# Altium PCB BaseStation.PcbDoc
Units mm, origin at the board's own origin, x right, y up, seen from the top; angles counter-clockwise.
Board outline 98.17 x 79.26 mm, 2 copper layers (Top Layer, Bottom Layer); 78 components, 65 nets, 312 pads, 263 vias.
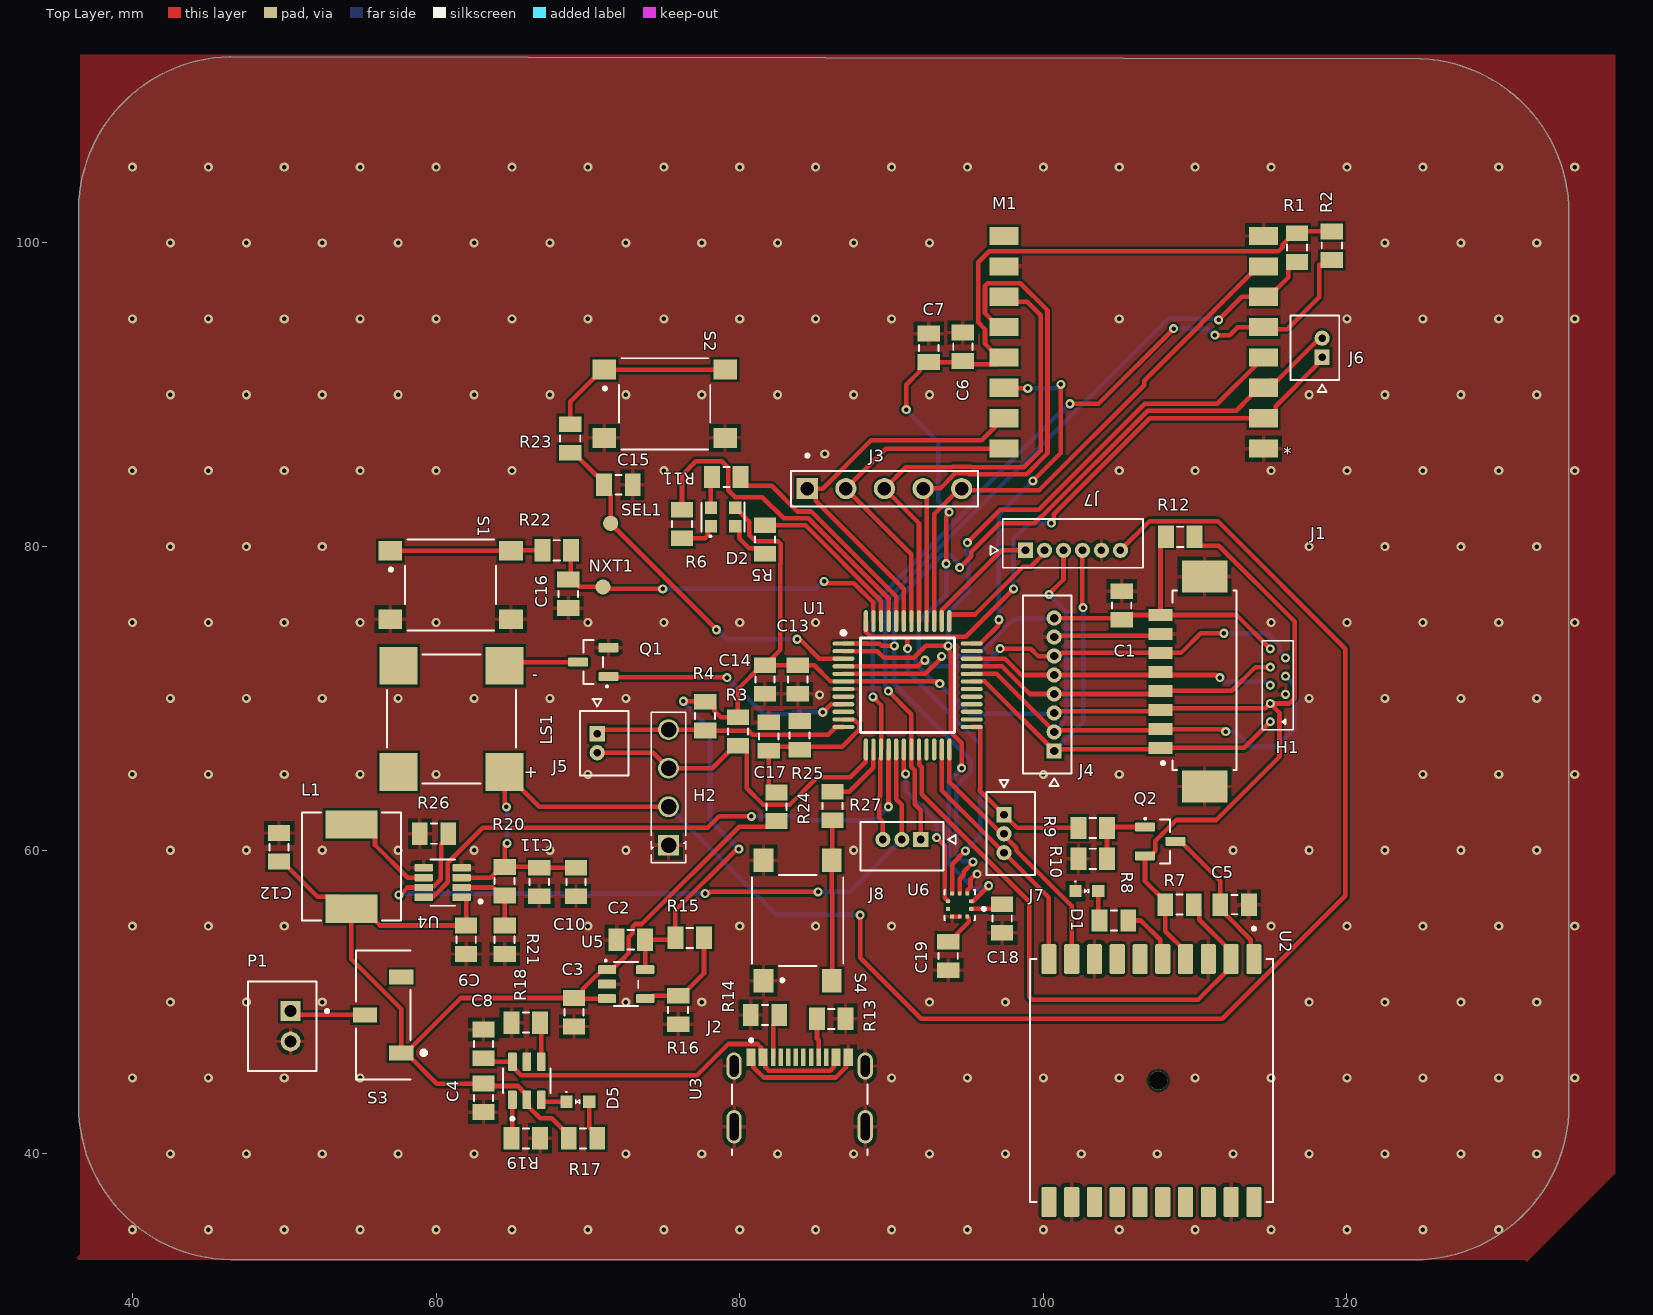
[diagram p0: Top Layer view]
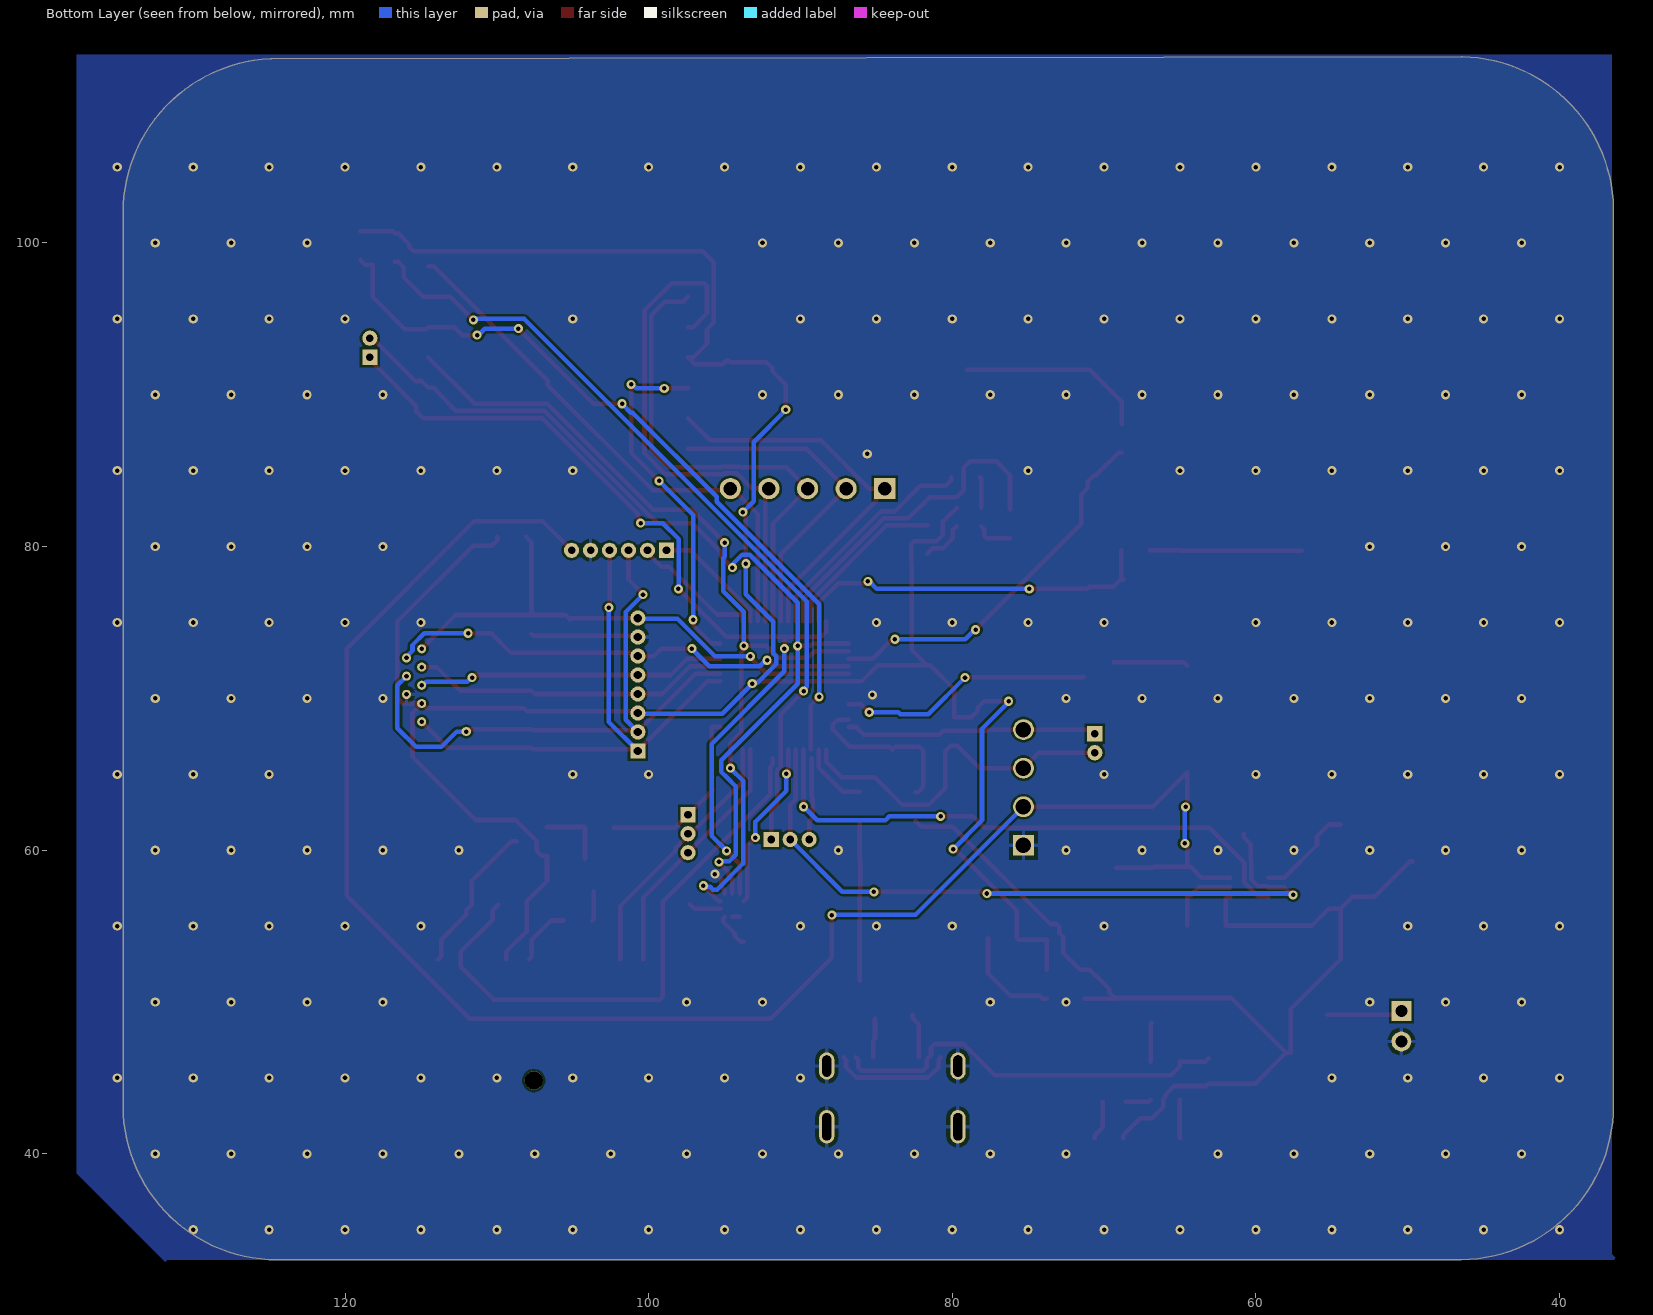
[diagram p1: Bottom Layer view, seen from below]
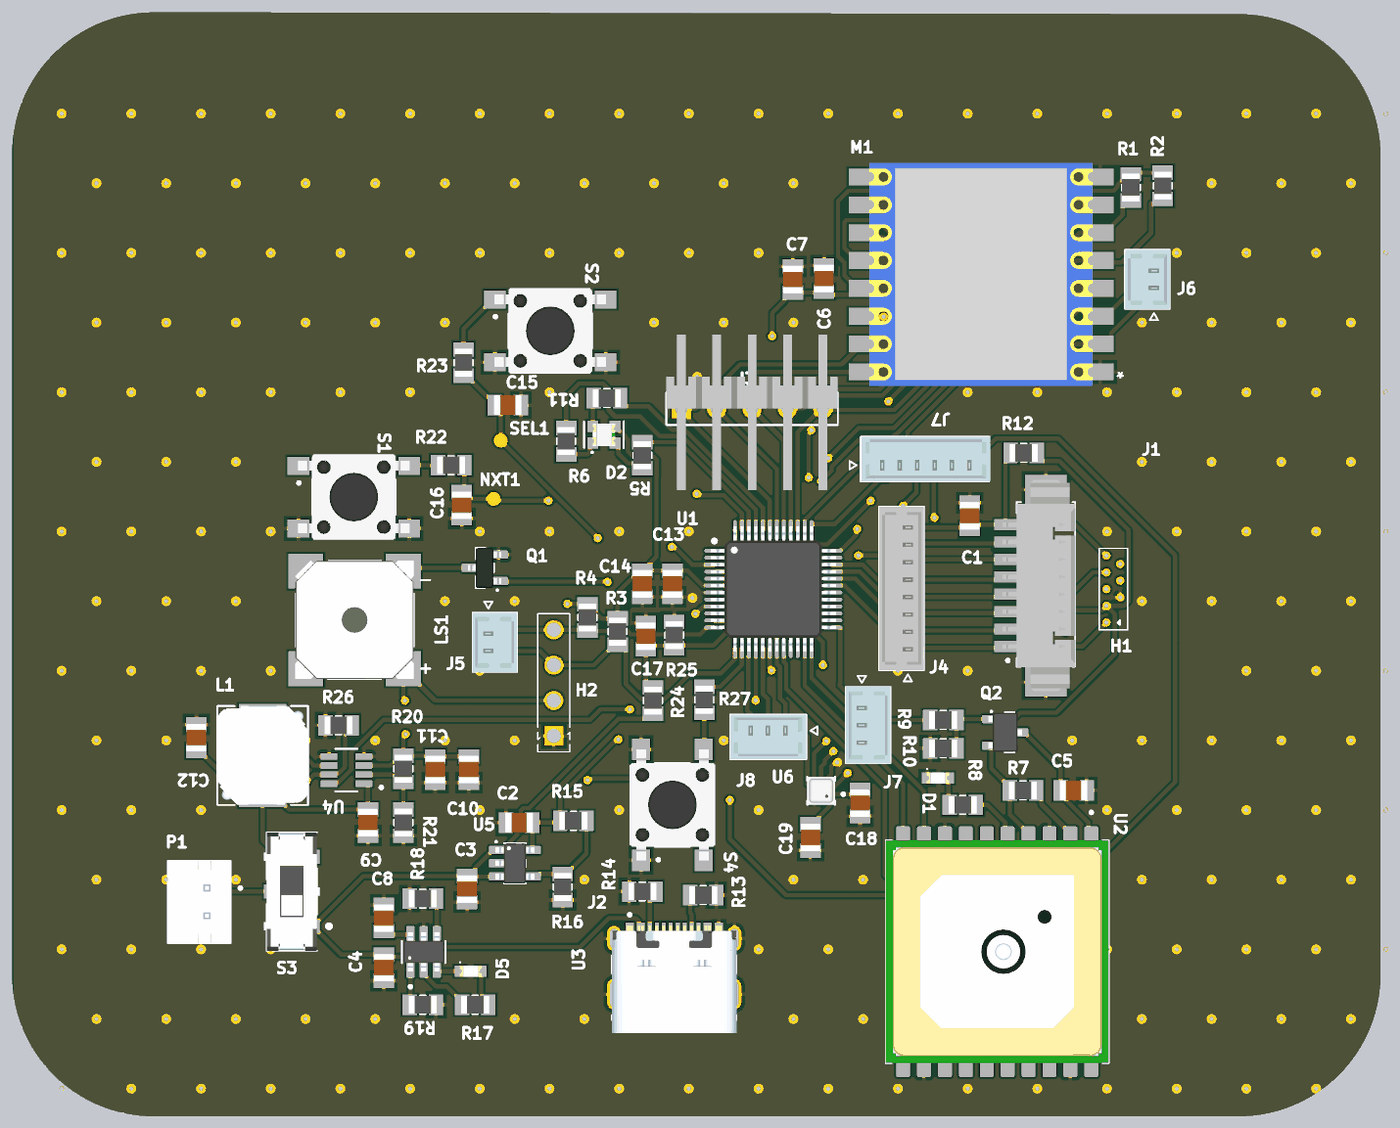
[diagram p2: 3D render of the assembled board from above, using the file's embedded part models]

## Layer stack, top to bottom
Top Solder: solder mask 0.0102, Solder Resist, Dk 3.5
Top Layer: signal copper 0.0356
Dielectric 1: dielectric 0.32, FR-4, Dk 4.8
Bottom Layer: signal copper 0.0356
Bottom Solder: solder mask 0.0102, Solder Resist, Dk 3.5

## Board outline
36.449,43.18 ccw(c46.609,43.18) 46.466,33.021 46.482,33.02 124.46,33.02 ccw(c124.46,43.18) 134.604,42.61 134.62,42.672 134.62,101.981 ccw(c124.46,101.981) 124.888,112.132 124.841,112.141 46.482,112.278 46.429,112.267 ccw(c46.609,102.108) 36.45,102.251 36.449,102.235

## Design rules (kind name [scope] priority, off if disabled: settings)
Clearance "Stitching GND" [IsStitchingVia and InNet('GND') vs (IsVia and (Not IsStitchingVia)) Or IsPad] p1: gap=0.127 ignorepadtopadclearanceinfootprint=FALSE
Clearance "Stitching No Net" [IsStitchingVia and InNet('No Net') vs (IsVia and (Not IsStitchingVia)) Or IsPad] p2: gap=0.127 ignorepadtopadclearanceinfootprint=FALSE
Clearance [All] p3: gap=0.152 ignorepadtopadclearanceinfootprint=FALSE
HoleSize [All] p1: absolutevalues=TRUE maxlimit=6.2 minlimit=0.3 maxpercent=80.000 minpercent=20.000
MinimumAnnularRing [All] p1: minimumring=0.15
MinimumSolderMaskSliver [All] p1: minsoldermaskwidth=0.1
PolygonConnect ViaConnect [IsVia] p1: connectstyle=Direct reliefconductorwidth=0.254 reliefentries=4 polygonreliefangle="90 Angle" airgapwidth=0.254
PolygonConnect [All] p2: connectstyle=Relief reliefconductorwidth=0.254 reliefentries=4 polygonreliefangle="90 Angle" airgapwidth=0.254
RoutingVias [All] p1: holewidth=0.3 width=0.6 viastyle="Through Hole" minholewidth=0.3 minwidth=0.5 maxholewidth=1 maxwidth=5
SilkToSilkClearance [All] p1: silktosilkclearance=0.1
SilkToSolderMaskClearance [IsPad] p1: minsilkscreentomaskgap=0.1 clearancetoexposedcopper=TRUE
SolderMaskExpansion [All] p1: expansion=0.051 istentingtop=FALSE
SupplyNets "Schematic Supply Nets_2" [InNet('3V3')] p1: voltage=0.000
SupplyNets "Schematic Supply Nets_1" [InNet('GND')] p2: voltage=0.000
SupplyNets "Schematic Supply Nets" [InNet('5V')] p3: voltage=0.000
Width [All] p1: maxlimit=25.4 minlimit=0.15 preferedwidth=0.3
26 further rules are at their usual default settings.

## Components (designator, comment, footprint, x,y, rotation, side; value= is the part's Value field where it differs from the comment)
C1 "1nF" CAPACITOR_0805_2012M-70N 105.156,76.124 r270 top
C2 "22uF" CAPACITOR_0805_2012M-70N 72.822,54.102 r0 top
C3 "22uF" CAPACITOR_0805_2012M-70N 69.088,49.327 r90 top
C4 "2.2uF" CAPACITOR_0805_2012M-70N 63.119,43.688 r270 top
C5 "22uF" CAPACITOR_0805_2012M-70N 112.598,56.417 r180 top
C6 "22uF" CAPACITOR_0805_2012M-70N 94.698,93.164 r90 top
C7 "220nF" CAPACITOR_0805_2012M-70N 92.456,93.091 r90 top
C8 "2.2uF" CAPACITOR_0805_2012M-70N 63.119,47.244 r270 top
C9 "22uF" CAPACITOR_0805_2012M-70N 61.976,54.102 r270 top
C10 "22uF" CAPACITOR_0805_2012M-70N 69.215,57.912 r90 top
C11 "22uF" CAPACITOR_0805_2012M-70N 66.802,57.912 r90 top
C12 "22uF" CAPACITOR_0805_2012M-70N 49.657,60.198 r270 top
C13 "100nF" CAPACITOR_0805_2012M-70N 83.82,71.247 r90 top
C14 "10uF" CAPACITOR_0805_2012M-70N 81.661,71.247 r90 top
C15 "2.2uF" CAPACITOR_0805_2012M-70N 72.009,84.074 r180 top
C16 "2.2uF" CAPACITOR_0805_2012M-70N 68.707,76.886 r90 top
C17 "100nF" CAPACITOR_0805_2012M-70N 81.915,67.488 r270 top
C18 "100nF" CAPACITOR_0805_2012M-70N 97.282,55.499 r90 top
C19 "100nF" CAPACITOR_0805_2012M-70N 93.726,53.035 r90 top
D1 "LTST-C190 Series" LED_0603_1608M_0.80mm 102.87,57.306 r0 top
D2 "B38G3RGB-10D0003H2U1930" LED_B38G3RGB-10D0003H2U1930_0606_1616M 78.905,81.948 r90 top
D5 "LTST-C190 Series" LED_0603_1608M_0.80mm 69.342,43.434 r0 top
H1 "Headerless Pogo Holes 8-pin" POGO_8_PIN_HEADER 115.451,70.866 r90 top
H2 "Header - 2.54mm,1x4-pin" HEADER_2.54MM_1x4PIN 75.311,64.135 r90 top
J1 "0532610871" MOLEX_0532610871 110.617,71.12 r90 top
J2 "UJ20-C-H-G-SMT-P16-TR" SAMESKY_UJ20-C-H-G-SMT-P16-TR 83.949,39.683 r0 top
J3 "5-146280-5" TE_5-146280-5 89.535,83.82 r0 top
J4 "0530470810" MOLEX_0530470810 100.711,70.916 r270 top
J5 "0530470210" MOLEX_0530470210 70.612,67.046 r90 top
J6 "0530470210" MOLEX_0530470210 118.364,93.101 r270 top
J7 "0530470310" MOLEX_0530470310 97.409,61.087 r90 top
J7 "0530470610" MOLEX_0530470610 101.951,79.756 r180 top
J8 "0530470310" MOLEX_0530470310 90.678,60.706 r0 top
L1 "SPM6530T-1R5M100" IND_SPM6530T-1R5M100 54.426,58.922 r90 top
LS1 "CMT-8504-100-SMT-TR" XDCR_CMT-8504-100-SMT-TR 61.016,68.651 r180 top
M1 "LORA127X-C1" LoRa127X-C1 113.959,101.456 r180 top
NXT1 "Test Pad" "Test Pad" 70.993,77.343 r0 top
P1 "B2B-PH-K-S" JST_B2B-PH-K-S 49.869,48.403 r90 top
Q1 "AS2312" SOT23-3N-1.15mm 70.358,72.39 r180 top
Q2 "SSM3J328R,LF" SOT23F-3-0.8mm 107.696,60.579 r0 top
R1 "180K" RESISTOR_0805_2012M-50N 116.713,99.695 r90 top
R2 "180K" RESISTOR_0805_2012M-50N 118.999,99.822 r90 top
R3 "4.7k" Resistor_0805_2012M-50N 79.883,67.818 r90 top
R4 "4.7k" Resistor_0805_2012M-50N 77.724,68.834 r90 top
R5 "220" RESISTOR_0805_2012M-50N 81.661,80.467 r90 top value=4.7K
R6 "220" RESISTOR_0805_2012M-50N 76.2,81.483 r90 top value=10K
R7 "180k" Resistor_0805_2012M-50N 108.966,56.417 r180 top
R8 "1K" RESISTOR_0805_2012M-50N 104.648,55.372 r0 top
R9 "1K" RESISTOR_0805_2012M-50N 103.251,61.468 r0 top
R10 "39K" RESISTOR_0805_2012M-50N 103.251,59.436 r0 top
R11 "220" RESISTOR_0805_2012M-50N 79.121,84.582 r0 top value=4.7K
R12 "47k" Resistor_0805_2012M-50N 109.017,80.645 r0 top
R13 "5.1K" RESISTOR_0805_2012M-50N 86.03,48.895 r180 top
R14 "5.1K" RESISTOR_0805_2012M-50N 81.661,49.149 r0 top
R15 "11K" RESISTOR_0805_2012M-50N 76.708,54.229 r180 top
R16 "2.2K" RESISTOR_0805_2012M-50N 75.946,49.479 r90 top
R17 "1.5K" RESISTOR_0805_2012M-50N 69.672,41.021 r0 top
R18 "560" RESISTOR_0805_2012M-50N 65.913,48.641 r0 top
R19 "10K" RESISTOR_0805_2012M-50N 65.913,41.021 r180 top
R20 "910K" RESISTOR_0805_2012M-50N 64.516,57.963 r90 top
R21 "100K" RESISTOR_0805_2012M-50N 64.516,54.102 r90 top
R22 "5.1K" RESISTOR_0805_2012M-50N 67.945,79.756 r0 top
R23 "5.1K" RESISTOR_0805_2012M-50N 68.834,87.122 r270 top
R24 "1M" RESISTOR_0805_2012M-50N 82.423,62.865 r270 top
R25 "1M" RESISTOR_0805_2012M-50N 83.947,67.564 r270 top
R26 "100K" RESISTOR_0805_2012M-50N 59.868,61.087 r0 top
R27 "5.1K" RESISTOR_0805_2012M-50N 86.106,62.916 r90 top
S1 "PTS645SL43SMTR92LFS" SW_PTS645SL43SMTR92LFS 60.96,77.47 r0 top
S2 "PTS645SL43SMTR92LFS" SW_PTS645SL43SMTR92LFS 75.057,89.408 r0 top
S3 "JS102011JCQN" SW_JS102011JCQN 56.515,49.149 r90 top
S4 "PTS645SL43SMTR92LFS" SW_PTS645SL43SMTR92LFS 83.82,55.372 r90 top
SEL1 "Test Pad" "Test Pad" 71.501,81.534 r270 top
U1 "MSP430FR2355TPT" LQFP_PT_48_N 91.059,70.866 r0 top
U2 "CD-PA1616D" XCVR_CD-PA1616D 107.119,44.831 r270 top
U3 "BQ21040DBVR" SOT95P280X145-6N 65.974,44.816 r90 top
U4 "RT4812GJ8F" SOT65P279X100-8N 60.432,57.871 r180 top
U5 "TLV75801PDBVR" SOT23-5N-1.45mm 72.517,51.181 r0 top
U6 "BMP390L" XDCR_BMP390L 94.488,56.388 r270 top

## Footprints (in the part's own frame and the unit in brackets; to place one, negate y for a bottom-side part, rotate by r counter-clockwise, add the part's x,y. Pads: shape width x height; smd on the part's side, far side on the other; paste and mask are expansions set on the pad)
CAPACITOR_0805_2012M-70N [mm] "Capacitor, 0805 (2012 metric), 0.7mm high, nominal pads,"
  rect 1.04x1.47 smd mask+0.051: 1(-0.94,0) 2(0.94,0)
  silkscreen extent -0.2,-0.64 0.2,0.64, body extent -1,-0.73 1,0.73, height 1.23
HEADER_2.54MM_1x4PIN [mm]
  rect 1.37x1.37 hole 1.02: 1(-3.81,0)
  round 1.37 hole 1.02: 2(-1.27,0) 3(1.27,0) 4(3.81,0)
  silkscreen extent -4.95,-1.14 4.95,1.14
IND_SPM6530T-1R5M100 [mm]
  rect 1.85x3.4 smd: 1(-2.775,0) 2(2.775,0)
  silkscreen extent -3.55,-3.25 3.55,3.25, body extent -3.55,-3.25 3.55,3.25, height 3
JST_B2B-PH-K-S [mm]
  rect 1.308x1.308 / inner round 1.308 / far side rect 1.308x1.308 hole 0.8: 1(1,-0.55)
  round 1.308 hole 0.8: 2(-1,-0.55)
  silkscreen extent -2.95,-3.05 2.95,2.25, body extent -2.95,-2.25 2.95,2.25, height 6
LED_0603_1608M_0.80mm [mm] "LED, 0603 (1608 metric), 0.8mm high"
  rect 0.8x0.8 smd mask+0.051: A(0.75,0) C(-0.75,0)
  silkscreen extent -0.79,-0.12 0.13,0.66, body extent -0.8,-0.4 0.8,0.4, height 0.8
LED_B38G3RGB-10D0003H2U1930_0606_1616M [mm] "RGB LED, 0606 (1616 metric), 0.4mm high"
  rect 0.813x0.8 smd mask+0.051: 1(-0.602,0.8) 2(0.602,0.8) 3(0.602,-0.8) 4(-0.602,-0.8)
  silkscreen extent -1.3,-1.42 0.97,1.42, body extent -0.8,-0.8 0.8,0.8, height 0.4
LoRa127X-C1 [mm]
  rect 1.9x1.2 smd paste-10 mask+0: 1(-0.55,15) 2(-0.55,13) 3(-0.55,11) 4(-0.55,9) 5(-0.55,7) 6(-0.55,5) 7(-0.55,3) 8(-0.55,1) 9(16.55,1) 10(16.55,3) 11(16.55,5) 12(16.55,7) 13(16.55,9) 14(16.55,11) 15(16.55,13) 16(16.55,15)
  body extent 0,0 16,16, height 2.1
LQFP_PT_48_N [mm]
  oval 1.45x0.28 smd paste+0 mask+0.051: 1(-4.225,2.75) 2(-4.225,2.25) 3(-4.225,1.75) 4(-4.225,1.25) 5(-4.225,0.75) 6(-4.225,0.25) 7(-4.225,-0.25) 8(-4.225,-0.75) 9(-4.225,-1.25) 10(-4.225,-1.75) 11(-4.225,-2.25) 12(-4.225,-2.75) 25(4.225,-2.75) 26(4.225,-2.25) 27(4.225,-1.75) 28(4.225,-1.25) 29(4.225,-0.75) 30(4.225,-0.25) 31(4.225,0.25) 32(4.225,0.75) 33(4.225,1.25) 34(4.225,1.75) 35(4.225,2.25) 36(4.225,2.75)
  oval 0.28x1.45 smd paste+0 mask+0.051: 13(-2.75,-4.225) 14(-2.25,-4.225) 15(-1.75,-4.225) 16(-1.25,-4.225) 17(-0.75,-4.225) 18(-0.25,-4.225) 19(0.25,-4.225) 20(0.75,-4.225) 21(1.25,-4.225) 22(1.75,-4.225) 23(2.25,-4.225) 24(2.75,-4.225) 37(2.75,4.225) 38(2.25,4.225) 39(1.75,4.225) 40(1.25,4.225) 41(0.75,4.225) 42(0.25,4.225) 43(-0.25,4.225) 44(-0.75,4.225) 45(-1.25,4.225) 46(-1.75,4.225) 47(-2.25,4.225) 48(-2.75,4.225)
  silkscreen extent -4.35,-3.1 3.1,3.57, body extent -4.5,-4.5 4.5,4.5, height 1.6
MOLEX_0530470210 [mm]
  rect 1x1 hole 0.5 mask+0.051: 1(0.625,0)
  round 1 hole 0.5 mask+0.051: 2(-0.625,0)
  silkscreen extent -2.12,-2.07 2.93,1.12, body extent -2.12,-2.06 2.13,1.14, height 4.21
MOLEX_0530470310 [mm] "Header - Picoblade 03-pin, TH, STR, 4.2mm height"
  rect 1x1 hole 0.5 mask+0.051: 1(1.25,0)
  round 1 hole 0.5 mask+0.051: 2(0,0) 3(-1.25,0)
  silkscreen extent -2.73,-2.05 3.55,1.15, body extent -2.75,-2.06 2.75,1.14, height 4.21
MOLEX_0530470610 [mm]
  rect 1x1 hole 0.5 mask+0.051: 1(3.125,0)
  round 1 hole 0.5 mask+0.051: 2(1.875,0) 3(0.625,0) 4(-0.625,0) 5(-1.875,0) 6(-3.125,0)
  silkscreen extent -4.62,-2.05 5.43,1.15, body extent -4.67,-2.06 4.58,1.14, height 4.21
MOLEX_0530470810 [mm]
  rect 1x1 hole 0.55 mask+0.051: 1(4.375,0)
  round 1 hole 0.55 mask+0.051: 2(3.125,0) 3(1.875,0) 4(0.625,0) 5(-0.625,0) 6(-1.875,0) 7(-3.125,0) 8(-4.375,0)
  silkscreen extent -5.87,-2.05 6.68,1.15, body extent -5.87,-2.05 5.87,1.15, height 4.2
MOLEX_0532610871 [mm] "Header - Picoblade 08-pin, SMT, RA, 3.4mm height"
  rect 0.8x1.6 smd mask+0.051: 1(-4.375,2.9) 2(-3.125,2.9) 3(-1.875,2.9) 4(-0.625,2.9) 5(0.625,2.9) 6(1.875,2.9) 7(3.125,2.9) 8(4.375,2.9)
  rect 2.1x3 smd mask+0.051: MP1(-6.925,0) MP2(6.905,0)
  silkscreen extent -5.83,-2.1 5.98,2.83, body extent -7.57,-2.1 7.58,3.1, height 3.42
POGO_8_PIN_HEADER [mm] "8-pin header for pogo pins"
  round 0.6 hole 0.3 mask+0.051: 1(-2.4,0.5) 2(-1.2,0.5) 3(-0.6,-0.5) 4(0,0.5) 5(0.6,-0.5) 6(1.2,0.5) 7(1.8,-0.5) 8(2.4,0.5)
  silkscreen extent -2.93,-1.02 2.93,1.03
RESISTOR_0805_2012M-50N [mm] "Resistor, 0805 (2012 metric), nominal pads"
  rect 1.04x1.47 smd mask+0.051: 1(-0.94,0) 2(0.94,0)
  silkscreen extent -0.2,-0.66 0.2,0.66, body extent -1,-0.63 1,0.62, height 0.5
Resistor_0805_2012M-50N [mm] "Resistor, 0805 (2012 metric), nominal pads"
  rect 1.04x1.47 smd mask+0.051: 1(-0.94,0) 2(0.94,0)
  silkscreen extent -0.2,-0.66 0.2,0.66, body extent -1,-0.63 1,0.62, height 0.5
SAMESKY_UJ20-C-H-G-SMT-P16-TR [mm]
  rect 0.595x1.15 smd mask+0.051: A1_B12(-3.2,6.675) A1_B12(3.2,6.675) A4_B9(-2.4,6.675) B4_A9(2.4,6.675)
  rect 0.295x1.15 smd mask+0.051: A5(-1.75,6.675) A6(-0.75,6.675) A7(0.75,6.675) A8(1.75,6.675) B5(1.25,6.675) B6(0.25,6.675) B7(-0.25,6.675) B8(-1.25,6.675)
  oval 1x1.8 hole 0.6 slot 1.4 at 90 deg: SH1(-4.32,6.1) SH3(4.32,6.1)
  oval 1x2.2 hole 0.6 slot 1.8 at 90 deg: SH2(-4.32,2.1) SH4(4.32,2.1)
  silkscreen extent -4.47,0.25 4.47,7.9, body extent -4.49,-0.69 4.49,7.01, height 3.31
SOT23-3N-1.15mm [mm] "SOT23, 3-pin, 1.15mm high, nominal pads"
  rrect25% 1.32x0.6 smd mask+0.051: 1(-1,0.95) 2(-1,-0.95) 3(1,0)
  silkscreen extent -0.93,-1.45 0.65,1.63, body extent -1.19,-1.45 1.21,1.45, height 0.91
SOT23-5N-1.45mm [mm] "SOT23, 5 pins, nominal pads, 1.45mm high"
  rrect25% 1.21x0.59 smd mask+0.051: 1(-1.255,0.95) 2(-1.255,0) 3(-1.255,-0.95) 4(1.255,-0.95) 5(1.255,0.95)
  silkscreen extent -1.37,-1.45 0.8,1.57, body extent -1.4,-1.45 1.4,1.45, height 1.45
SOT23F-3-0.8mm [mm] "SOT23, 3-pin, flat leads, 0.8mm high"
  rrect25% 1.32x0.6 smd mask+0.051: 1(-1,0.95) 2(-1,-0.95) 3(1,0)
  silkscreen extent -1.02,-1.45 0.65,1.52, body extent -1.2,-1.4 1.2,1.4, height 0.88
SOT65P279X100-8N [mm]
  rrect25% 1.22x0.48 smd: 1(-1.25,0.975) 2(-1.25,0.325) 3(-1.25,-0.325) 4(-1.25,-0.975) 5(1.25,-0.975) 6(1.25,-0.325) 7(1.25,0.325) 8(1.25,0.975)
  silkscreen extent -2.6,-1.53 0.8,1.53
SOT95P280X145-6N [mm]
  rrect25% 1.21x0.58 smd: 1(-1.255,0.95) 2(-1.255,0) 3(-1.255,-0.95) 4(1.255,-0.95) 5(1.255,0) 6(1.255,0.95)
  silkscreen extent -2.6,-1.56 0.8,1.56, body extent -1.4,-1.45 1.4,1.45, height 1.45
SW_JS102011JCQN [mm]
  rect 1x1.6 smd: 1(-2.5,-1.2) 2(0,1.2) 3(2.5,-1.2)
  silkscreen extent -4.25,-2.81 4.25,1.8, body extent -4.25,-2 4.25,2, height 5.35
SW_PTS645SL43SMTR92LFS [mm]
  rect 1.55x1.3 smd: 1(-3.975,2.25) 2(3.975,2.25) 3(-3.975,-2.25) 4(3.975,-2.25)
  silkscreen extent -4.04,-3 3,3, body extent -4,-3 4,3, height 4.3
TE_5-146280-5 [mm]
  rect 1.398x1.398 / inner round 1.398 / far side rect 1.398x1.398 hole 0.89: 1(-5.08,0)
  round 1.398 hole 0.89: 2(-2.54,0) 3(0,0) 4(2.54,0) 5(5.08,0)
  silkscreen extent -6.15,-1.17 6.15,2.27, body extent -6.15,-5.84 6.15,5.33, height 1.17
"Test Pad" [mm] "Exposed copper pad"
  round 1 smd paste-10: 1(0,0)
XCVR_CD-PA1616D [mm]
  rrect25% 2x1 smd: 1(-8,6.75) 2(-8,5.25) 3(-8,3.75) 4(-8,2.25) 5(-8,0.75) 6(-8,-0.75) 7(-8,-2.25) 8(-8,-3.75) 9(-8,-5.25) 10(-8,-6.75) 11(8,-6.75) 12(8,-5.25) 13(8,-3.75) 14(8,-2.25) 15(8,-0.75) 16(8,0.75) 17(8,2.25) 18(8,3.75) 19(8,5.25) 20(8,6.75)
  round 1.21 hole 1.21 unplated: ""(0,0.45)
  silkscreen extent -10.1,-8 8,8, body extent -8,-8 8,8, height 6.7
XDCR_BMP390L [mm]
  rect 0.25x0.275 smd: 1(0.25,0.763) 2(-0.25,0.763) 6(-0.25,-0.763) 7(0.25,-0.763)
  rect 0.275x0.25 smd: 3(-0.763,0.5) 4(-0.763,0) 5(-0.763,-0.5) 8(0.763,-0.5) 9(0.763,0) 10(0.763,0.5)
  silkscreen extent -1,-1 1,1.69, body extent -1,-1 1,1, height 0.8
XDCR_CMT-8504-100-SMT-TR [mm]
  rect 2.5x2.5 smd: 1(3.5,3.5) 2(3.5,-3.5) N(-3.5,-3.5) P(-3.5,3.5)
  silkscreen extent -4.25,-4.25 4.25,4.25, body extent -4.25,-4.28 4.28,4.25, height 4

## Part data
C1: library part "Generic Capacitor", "Passive - Capacitor, Generic", Tolerance=5%
C2 C3 C5 C6 C13 C14 C17: library part "Generic Capacitor", "Passive - Capacitor, Generic", Tolerance=?%
C4 C8: library part C0805C225K8PACTU, "Passive - Capacitor, X5R, 2.2uF Max, 10V, 0805 (2012 Metric), ±10%, -55°C ~ 85°C. 2uF @ 5V, 1.1uF @ 10V", Capacitance at Rated Voltage=50%, Package=0402, Rated Voltage=10V, Supplier 1 Part No.=399-C0805C225K8PAC7800-ND, Temp Range="-55°C ~ 85°C", Temperature Coefficient=X5R, Tolerance=±10%, APSS Standard Part="APSS Standard", MF Part No.=C0805C225K8PACTU, Supplier 1=Digikey
C7: library part C0805C224K1RAC7800, "Passive - Capacitor, X7R, 220nF Max, 100V, 0805 (2012 Metric), ±10%, -55°C ~ 85°C. 200nF @ 10V, 110nF @ 50V, 55nF @ 100V", Capacitance at Rated Voltage=25%, Package=0805, Rated Voltage=100V, Supplier 1 Part No.=399-C0805C224K1RAC7800CT-ND, Temp Range="-55°C ~ 85°C", Temperature Coefficient=X7R, Tolerance=±10%, APSS Standard Part="APSS Standard", MF Part No.=C0805C224K1RAC7800, Supplier 1=Digikey
C9 C10 C11 C12: library part GRM21BR61C226ME44L, "Passive - Capacitor, X5R, 22uF Max, 16V, 0805 (2012 Metric), ±20%, -55°C ~ 85°C. 9.4uF @ 5V, 3.2uF @ 15V, 1.9uF @ 25V", Capacitance at Rated Voltage=10%, Package=0805, Rated Voltage=16V, Supplier 1 Part No.=490-10747-1-ND, Temp Range="-55°C ~ 85°C", Temperature Coefficient=X5R, Tolerance=±20%, APSS Standard Part="APSS Standard", MF Part No.=GRM21BR61C226ME44L, Supplier 1=Digikey
C15 C16: library part C0805C225K8PACTU, "Passive - Capacitor, X5R, 2.2uF Max, 10V, 0805 (2012 Metric), ±10%, -55°C ~ 85°C. 2uF @ 5V, 1.1uF @ 10V", Capacitance at Rated Voltage=50%, Package=0805, Rated Voltage=10V, Supplier 1 Part No.=399-C0805C225K8PAC7800-ND, Temp Range="-55°C ~ 85°C", Temperature Coefficient=X5R, Tolerance=±10%, APSS Standard Part="APSS Standard", MF Part No.=C0805C225K8PACTU, Supplier 1=Digikey
C18 C19: library part C0805C102J1GACTU, "Passive - Capacitor, C0G, 1nF, 100V, 0805 (2012 Metric), ±5%, -55°C ~ 125°C.", Capacitance at Rated Voltage=100%, Package=0805, Rated Voltage=100V, Supplier 1 Part No.=399-C0805C102J1GAC7800CT-ND, Temp Range="-55°C ~ 125°C", Temperature Coefficient=C0G, Tolerance=±5%, APSS Standard Part="APSS Standard", MF Part No.=C0805C102J1GACTU, Supplier 1=Digikey
D1: "Diode - LED, 0603", Colour=Green, MF Part No.=LTST-C190KGKT, Package=0603, Rated Voltage="5V Reverse", Temp Range="-30°C ~ 85°C", APSS Standard Part="APSS Standard", Supplier 1=Digikey
D2: "Diode - LED, RGB, 2V Red, 3V Green, 3V Blue 0606 (1616 Metric)", Package=0606, Supplier 1 Part No.=3147-B38G3RGB-10D0003H2U1930CT-ND, Temp Range="-40°C ~ 85°C", APSS Standard Part="APSS Standard", MF Part No.=B38G3RGB-10D0003H2U1930, Supplier 1=Digikey
D5: "Diode - LED, 0603", Colour=Green, MF Part No.=LTST-C190KGKT, Package=0603, Rated Voltage="5V Reverse", Supplier 1 Part No.=160-1435-1-ND, Temp Range="-30°C ~ 85°C", APSS Standard Part="APSS Standard", Supplier 1=Digikey
J1: "Header - Picoblade 08-pin, SMT, RA", Supplier 1 Part No.=WM7626CT-ND, APSS Standard Part="APSS Standard", MF Part No.=0532610871, Mounting Type="Surface Mount", Orientation="Right Angle", Pins=8, Pitch=1.25mm, Supplier 1=Digikey
J2: "Header - USB-C 2.0 Surface Mount, Receptacle Connector 24 Position (16+8 Dummy), Right Angle, Long mounting legs", MF Part No.=USB4105-GF-A, Rated Voltage=48VDC, Supplier 1 Part No.=2073-USB4105-GF-ACT-ND, Temp Range="-40°C ~ 85°C", APSS Standard Part="APSS Standard", Supplier 1=Digikey
J3: "05 MODII HDR SRST B/A .100CL", Package=None, Availability=Unavailable, MP=5-146280-5, Price=None
J4: "Header - Picoblade 08-pin, TH, STR", Supplier 1 Part No.=WM1737-ND, APSS Standard Part="APSS Standard", MF Part No.=0530470810, Mounting Type=Through-hole, Orientation=Straight, Pins=8, Pitch=1.25mm, Supplier 1=Digikey
J5 J6: "Header - Picoblade 02-pin, TH, STR", Supplier 1 Part No.=WM1731-ND, APSS Standard Part="APSS Standard", MF Part No.=0530470210, Mounting Type=Through-hole, Orientation=Straight, Pins=2, Pitch=1.25mm, Supplier 1=Digikey
J7 J8: "Header - Picoblade 03-pin, TH, STR", Supplier 1 Part No.=WM1732-ND, APSS Standard Part="APSS Standard", MF Part No.=0530470310, Mounting Type=Through-hole, Orientation=Straight, Pins=3, Pitch=1.25mm, Supplier 1=Digikey
J7: "Header - Picoblade 06-pin, TH, STR", Supplier 1 Part No.=WM1735-ND, APSS Standard Part="APSS Standard", MF Part No.=0530470610, Mounting Type=Through-hole, Orientation=Straight, Pins=6, Pitch=1.25mm, Supplier 1=Digikey
L1: "1.5 ÂµH Shielded Drum Core, Wirewound Inductor 11 A 10.67mOhm Max Nonstandard", Package="NON STANDARD-2 TDK", Check_prices=https://www.snapeda.com/parts/SPM6530T-1R5M100/TDK/view-part/?ref=eda, Digi-Key_Part_Number=445-3881-2-ND, MF=TDK, MP=SPM6530T-1R5M100, Purchase-URL=https://pricing.snapeda.com/search/part/SPM6530T-1R5M100/?ref=eda, SnapEDA_Link=https://www.snapeda.com/parts/SPM6530T-1R5M100/TDK/view-part/?ref=snap
LS1: "8.5 mm, 5 Vo-p, 100 dB, Surface Mount (SMT), Magnetic Audio Transducer Buzzer", MF Part No.=CMT-8504-100-SMT-TR
P1: "Connector Header Through Hole 2 position 0.079 (2.00mm)", Package=None, Check_prices=https://www.snapeda.com/parts/B2B-PH-K-S/JST/view-part/?ref=eda, MF="JST Sales America Inc.", MP=B2B-PH-K-S, SnapEDA_Link=https://www.snapeda.com/parts/B2B-PH-K-S/JST/view-part/?ref=snap
Q1: "Transistor - MOSFET, N-Channel AS2312", Package=SOT23-3, Power=1.2W, Rated Voltage="20 Vds", Supplier 1 Part No.=4530-AS2312CT-ND, Temp Range="0°C ~ 150°C (TJ)", APSS Standard Part="APSS Standard", MF Part No.=AS2312, Supplier 1=Digikey
Q2: "Transistor - MOSFET, P-Channel SSM3J328R,LF", Package=SOT23-3, Power=1W, Rated Voltage="20 Vds", Supplier 1 Part No.=SSM3J328RLFCT-ND, Temp Range="0°C ~ 150°C (TJ)", APSS Standard Part="APSS Standard", MF Part No.=SSM3J328R,LF, Supplier 1=Digikey
R1 R2 R8 R9 R10 R13 R14 R15 R16 R17 R18 R19 R20 R21 R22 R23 R24 R25 R26 R27: library part "Generic Resistor", "Passive - Resistor, Generic", Tolerance=?%
R3 R4 R5 R6 R11 R12: library part "Generic Resistor", "Passive - Resistor, Generic", Tolerance=5%
  R5 R6 R11: MF Part No.=220
R7: library part "RMCF0805JT Series", "Passive - Resistor Series, 0805, 5%, 100m - 22M, E24, 0.063W, 1/16W, ±200ppm/°C, -55°C ~ 155°C, 0805 (2012 Metric)", MF Part No.=RMCF0805JT180K, Package=0805, Power=1/8W, Rated Voltage=150V, Temp Range="-55°C ~ 155°C", Temperature Coefficient=±200ppm/°C, Tolerance=5%, Value Range="100m ~ 22M", APSS Standard Part="APSS Standard", E Series=E24, Supplier 1=Digikey
S1 S2: "Switch - SPST, Momentary, Normally Open, 50mA @ 12VDC", MF Part No.=SW_PTS645SL43SMTR92LFS, Rated Voltage="250V AC", Supplier 1 Part No.=CKN10880CT-ND, Temp Range="-40°C ~ 85°C", APSS Standard Part="APSS Standard", Mounting Type="Surface Mount", Supplier 1=Digikey
S3: "Switch - Slide, SPDT, Straight, Break Before Make, 300mA, 6V", Rated Voltage=6V, Supplier 1 Part No.=CKN10721CT-ND, Temp Range="-40°C ~ 85°C", APSS Standard Part="APSS Standard", MF Part No.=JS102011JCQN, Mounting Type=Through-hole, Orientation=Straight, Supplier 1=Digikey
S4: "Switch - Tact, SPST, Momentary, Normally Open, 50mA @ 12VDC", MF Part No.=SW_PTS645SL43SMTR92LFS, Rated Voltage="250V AC", Supplier 1 Part No.=CKN10880CT-ND, Temp Range="-40°C ~ 85°C", APSS Standard Part="APSS Standard", Mounting Type="Surface Mount", Supplier 1=Digikey
U1: "IC - Microcontroller, 24MHz, 32KB FRAM, Op-Amps/PGAs, 12-bit DACs, 12-bit ADC, 48-LQFP, -40 to 105C", Package=LQFP-48, Rated Voltage=3.6V, Supplier 1 Part No.=296-50260-ND, Temp Range="-40°C ~ 105°C", APSS Standard Part="APSS Standard", MF Part No.=MSP430FR2355TPT, Supplier 1=Digikey
U2: "CD-PA1616DGNSS patch antenna module", Package=Package, Availability="Not in stock", Check_prices=https://www.snapeda.com/parts/CD-PA1616D/CD+Top/view-part/?ref=eda, MF="CD Top", MP=CD-PA1616D, Price=None, SnapEDA_Link=https://www.snapeda.com/parts/CD-PA1616D/CD+Top/view-part/?ref=snap
U3: "1-cell, 0.8-A Li-ion and Li-polymer battery charger", Package="SOT-23-6 Texas Instruments", Check_prices=https://www.snapeda.com/parts/BQ21040DBVR/Texas+Instruments/view-part/?ref=eda, MF="Texas Instruments", MP=BQ21040DBVR, SnapEDA_Link=https://www.snapeda.com/parts/BQ21040DBVR/Texas+Instruments/view-part/?ref=snap
U4: "Boost Switching Regulator IC Positive Adjustable 1.8V 1 Output 2A SOT-23-8 Thin, TSOT-23-8", Package="TSOT-23 Richtek", Availability=Unavailable, DigiKey-Purchase-URL=https://snapeda.com/shop?store=DigiKey&id=699858, MF="Richtek USA", MP=RT4812GJ8F, Price=None, SnapEDA_Link=https://www.snapeda.com/parts/RT4812GJ8F/Richtek%20USA%20Inc./view-part/699858/?ref=snap
U5: "IC - Regulator, LDO, 500 mA, Low Quiescent Current, SOT23-5 /  / Vout=Vfeedback *(1+(R1/R2)) / where the feedback voltage is 0.55V", Package=SOT-23-5, Rated Voltage=6V, Supplier 1 Part No.=296-TLV75801PDBVRCT-ND, Temp Range="-40°C ~ 125°C (TJ)", APSS Standard Part="APSS Standard", MF Part No.=TLV75801PDBVR, Supplier 1=Digikey
U6: "Pressure Sensor 4.35PSI ~ 18.13PSI (30kPa ~ 125kPa) Absolute - - 10-WFLGA", Package=None, Check_prices=https://www.snapeda.com/parts/BMP390L/Bosch+Sensortec/view-part/?ref=eda, MF="Bosch Sensortec", MP=BMP390L, SnapEDA_Link=https://www.snapeda.com/parts/BMP390L/Bosch+Sensortec/view-part/?ref=snap

## Via types
v1: diameter 0.6, hole 0.3, Top Layer to Bottom Layer, 263 vias

## Nets (pads, with @x,y where several pads share a name; then routed paths per layer and width w, separated by ;. In a path a pad name is that pad's centre, name@x,y a point inside that pad or via, vN(x,y) a via of type N, cw(c..) or ccw(c..) an arc to the next point about the centre after c; other vN are vias at no path point)
3V3: C2.2 C6.1 C7.1 C13.2 C14.2 D2.3 H1.2 J1.3 J4.3 M1.13 Q2.2 R1.2 R2.2 R3.2 R4.2 R7.2 R12.2 R15.2 U1.6 U2.4 U5.5 | length 180.3
  Top Layer w0.3: U5.5 73.772,54.092 C2.2 75.641,54.102 R15.2 75.768,56.046 79.793,60.071 v1(79.942,60.071) v1@80.01,60.071 ; v1(76.287,69.81) 77.903,69.81 78.309,69.404 78.309,69.189 78.74,68.758 R3.2 79.883,70.624 81.446,72.187 C14.2 C14.2@81.672,72.187 ; D2.3 79.705,82.544 79.955,82.294 79.961,82.294 80.201,82.054 80.23,82.054 80.407,81.877 80.407,81.848 80.624,81.631 80.624,80.762 81.036,80.349 82.521,80.349 82.698,80.172 82.698,78.882 82.677,78.86 82.677,73.192 C14.2@81.672,72.187 ; v1(90.973,89.027) 90.973,90.668 91.871,91.566 91.871,91.781 92.241,92.151 C7.1 94.625,92.151 C6.1 94.913,92.224 95.131,92.006 96.959,92.006 M1.13 97.059,92.456 96.157,93.358 96.157,94.328 95.704,94.78 95.704,98.729 96.431,99.456 115.487,99.456 115.761,99.731 115.761,99.898 116.498,100.635 R1.2 116.84,100.762 R2.2 ; v1(93.177,70.977) 93.096,70.977 92.956,71.116 U1.6 85.983,71.116 84.912,72.187 C13.2 C14.2@81.672,72.187 ; v1(93.599,78.867) 93.599,82.005 93.788,82.194 v1(93.788,82.275) ; J4.3 100.811,69.141 108.013,69.141 108.214,69.342 114.626,69.342 H1.2 H1.2 H1.2@114.954,69.664 ; U2.4 109.369,53.331 108.026,54.674 R7.2 108.026,56.632 106.696,57.962 Q2.2 107.056,59.629 107.378,59.951 107.378,60.605 108.763,61.99 111.39,61.99 115.554,66.154 115.554,69.064 H1.2@114.954,69.664 ; R12.2 109.957,80.43 110.327,80.06 111.56,80.06 116.554,75.066 116.554,70.016 116.201,69.664 H1.2@114.954,69.664
  Bottom Layer w0.3: v1@76.2,69.85 78.042,68.008 78.042,61.971 v1(79.942,60.071) ; v1@90.932,89.027 93.076,86.883 93.076,82.986 v1(93.788,82.275) ; v1(93.599,78.867) 93.599,76.857 91.788,75.046 91.788,72.955 91.6,72.767 91.6,72.267 92.833,71.034 93.119,71.034 95.163,68.991 100.661,68.991 J4.3
5V: C10.2 C11.2 H2.2 J7.6 LS1.P R20.2 U4.3 | length 116.3
  Top Layer w0.3: U4.3 63.594,58.196 64.301,58.903 R20.2 ; v1@64.516,60.325 R20.2 ; v1(64.632,62.853) 64.632,62.934 64.516,63.05 LS1.P 66.802,62.865 H2.2 ; C10.2 C11.2 66.751,58.903 R20.2 ; v1(87.935,55.721) 87.935,52.908 91.948,48.895 111.787,48.895 119.888,56.996 119.888,73.279 111.485,81.682 107.002,81.682 J7.6
  Bottom Layer w0.3: v1(64.684,60.452) v1@64.684,62.697 ; H2.2 82.423,55.753 v1@87.884,55.753
"BMP C\S\": U1.18 U6.6 | length 11.2
  Top Layer w0.3: U1.18 90.809,65.228 90.932,65.105 v1(90.932,65.024) ; v1(92.964,60.833) 93.504,60.293 93.504,56.859 U6.6
  Bottom Layer w0.3: v1(90.932,65.024) 90.932,63.904 92.964,61.872 v1(92.964,60.833)
Button1: C16.2 NXT1.1 R22.2 U1.47 | length 24.3
  Top Layer w0.3: R22.2 68.885,78.004 C16.2 68.922,77.826 69.405,77.343 NXT1.1 71.12,77.216 v1(74.93,77.216) ; v1@85.598,77.597 87.503,77.597 88.809,76.291 U1.47
  Bottom Layer w0.3: v1(74.93,77.216) 84.988,77.216 85.48,77.708 v1(85.557,77.708)
Button2: C15.2 R23.2 SEL1.1 U1.3 | length 24.9
  Top Layer w0.3: R23.2 69.049,86.182 70.572,84.659 70.699,84.659 71.069,84.289 C15.2 71.069,83.859 71.501,83.427 SEL1.1 71.501,81.509 78.459,74.551 v1(78.459,74.526) ; v1@83.82,73.787 83.823,73.79 84.071,73.79 85.245,72.616 U1.3
  Bottom Layer w0.3: v1@78.486,74.549 79.135,73.9 v1(83.782,73.9)
CTS: J7.1@98.826,79.756 U1.38 | length 7.9
  Top Layer w0.3: U1.38 93.319,75.101 93.319,75.812 97.263,79.756 J7.1@98.826,79.756
DIO1: J3.1 M1.15 U1.43 | length 26.2
  Top Layer w0.3: U1.43 90.799,75.101 90.799,77.222 85.004,83.017 85.004,83.271 J3.1 85.471,83.82 88.646,86.995 95.948,86.995 M1.15
DIO2: J3.2 M1.16 U1.42 | length 22
  Top Layer w0.3: U1.42 91.309,79.506 J3.2 89.631,86.456 M1.16
DIO3: J3.3 M1.11 U1.41 | length 32.9
  Top Layer w0.3: U1.41 91.809,81.546 J3.3 90.932,85.217 93.956,85.217 94.013,85.274 95.217,85.274 95.274,85.217 98.711,85.217 99.822,86.328 99.822,95.25 98.933,96.139 97.726,96.139 M1.11
DIO4: J3.4 M1.12 U1.40 | length 35.8
  Top Layer w0.3: U1.40 92.309,83.289 92.075,83.523 J3.4 92.1,83.845 93.224,83.845 94.2,84.821 95.03,84.821 95.087,84.765 98.899,84.765 100.274,86.14 100.274,95.568 98.484,97.358 96.334,97.358 96.157,97.181 96.157,95.358 97.059,94.456 M1.12
DIO5: J3.5 M1.7 U1.39 | length 35.8
  Top Layer w0.3: U1.39 92.809,82.148 94.481,83.82 J3.5 94.709,83.726 99.728,83.726 106.636,90.634 106.636,90.933 114.159,98.456 M1.7
EN: J8.2 R26.2 U1.17 U4.7 | length 47.3
  Top Layer w0.3: v1(57.548,57.057) 57.629,57.057 58.119,57.546 U4.7 59.272,57.636 59.865,57.636 60.317,58.089 60.317,59.363 60.336,59.383 60.336,60.4 60.808,60.872 R26.2 ; v1(77.724,57.15) 77.781,57.207 77.994,57.207 78.044,57.257 v1(85.168,57.257) ; U1.17 90.309,63.361 90.678,62.992 J8.2
  Bottom Layer w0.3: v1@57.404,57.15 v1(77.724,57.15) ; v1@85.09,57.277 87.249,57.277 J8.2
G\P\S\_\E\N\: J7.1@97.409,62.337 R9.1 U1.25 | length 12.3
  Top Layer w0.3: U1.25 95.848,68.116 95.858,68.106 95.858,64.095 95.82,64.057 95.82,63.926 97.059,62.687 97.409,62.337 97.759,61.987 98.278,61.468 R9.1
GND: C1.1 C2.1 C3.1 C4.2 C5.1 C6.2 C7.2 C8.1 C9.2 C10.1 C11.1 C12.1 C13.1 C14.1 C15.1 C16.1 C17.1 C18.1 C19.1 D1.C H1.3 H2.1 J1.7 J1.MP1 J1.MP2 J2.A1_B12 J2.SH1 J2.SH2 J2.SH3 J2.SH4 J4.7 J7.5 M1.1 M1.8 M1.10 P1.2 Q1.2 R10.1 R13.1 R14.1 R16.1 R18.1 R19.1 R21.1 R25.1 R26.1 S1.3 S1.4 S2.3 S2.4 S4.1 S4.2 U1.7 U2.3 U2.8 U2.12 U2.19 U3.5 U4.4 U4.5 U5.2 U6.3 U6.8 U6.9 | length 17.3
  Top Layer w0.3: J2.A1_B12@80.749,46.358 80.896,46.21 80.896,45.71 81.579,45.028 86.319,45.028 87.001,45.71 87.001,46.21 J2.A1_B12@87.149,46.358 ; U6.8 U6.9 ; U6.3 94.988,57.354 95.202,57.569 95.202,58.097 95.471,58.365 95.576,58.365 v1(95.633,58.423) ; J4.7 100.811,74.141 107.613,74.141 J1.7
  other v1: 40,35 45,35 50,35 55,35 60,35 65,35 70,35 75,35 80,35 85,35 90,35 95,35 100,35 105,35 110,35 115,35 120,35 125,35 130,35 42.5,40 47.5,40 52.5,40 57.5,40 62.5,40 72.5,40 77.5,40 82.5,40 87.5,40 92.5,40 97.5,40 102.5,40 107.5,40 112.5,40 117.5,40 122.5,40 127.5,40 132.5,40 40,45 45,45 50,45 55,45 90,45 95,45 100,45 105,45 110,45 115,45 120,45 125,45 130,45 135,45 42.5,50 47.5,50 52.5,50 72.5,50 77.5,50 92.5,50 97.5,50 117.5,50 122.5,50 127.5,50 132.5,50 40,55 45,55 50,55 70,55 80,55 85,55 90,55 115,55 120,55 125,55 130,55 135,55 42.5,60 47.5,60 52.5,60 57.5,60 62.5,60 67.5,60 72.5,60 87.5,60 112.5,60 117.5,60 122.5,60 127.5,60 132.5,60 40,65 45,65 50,65 55,65 60,65 70,65 100,65 105,65 125,65 130,65 135,65 42.5,70 47.5,70 52.5,70 57.5,70 62.5,70 67.5,70 72.5,70 117.5,70 122.5,70 127.5,70 132.5,70 85.258,70.231 40,75 45,75 50,75 55,75 60,75 70,75 75,75 80,75 85,75 115,75 120,75 125,75 130,75 135,75 42.5,80 47.5,80 52.5,80 117.5,80 122.5,80 127.5,80 132.5,80 40,85 45,85 50,85 55,85 60,85 65,85 75,85 105,85 110,85 115,85 120,85 125,85 130,85 135,85 85.598,86.106 42.5,90 47.5,90 52.5,90 57.5,90 62.5,90 67.5,90 72.5,90 77.5,90 82.5,90 87.5,90 92.5,90 117.5,90 122.5,90 127.5,90 132.5,90 40,95 45,95 50,95 55,95 60,95 65,95 70,95 75,95 80,95 85,95 90,95 105,95 120,95 125,95 130,95 135,95 42.5,100 47.5,100 52.5,100 57.5,100 62.5,100 67.5,100 72.5,100 77.5,100 82.5,100 87.5,100 92.5,100 122.5,100 127.5,100 132.5,100 40,105 45,105 50,105 55,105 60,105 65,105 70,105 75,105 80,105 85,105 90,105 95,105 100,105 105,105 110,105 115,105 120,105 125,105 130,105 135,105
"GPS R\e\s\e\t\": R7.1 U1.20 U2.2 | length 38.1
  Top Layer w0.3: U1.20@91.819,66.066 91.819,65.629 91.987,65.461 91.987,63.682 99.06,56.609 99.06,50.341 99.236,50.165 110.203,50.165 112.369,52.331 U2.2 112.369,53.331 110.276,55.424 110.276,56.047 R7.1
GPS_UART_RX: J7.3@97.409,59.837 U1.23 U2.10 | length 16.7
  Top Layer w0.3: U1.23 93.309,63.937 100.369,56.877 U2.10
GPS_UART_TX: J7.2@97.409,61.087 U1.24 U2.9 | length 17.2
  Top Layer w0.3: U1.24 93.809,64.509 97.177,61.141 J7.2@97.355,61.141 ; J7.2@97.409,61.087 97.409,60.972 98.211,60.169 98.211,59.987 101.869,56.329 U2.9
Ilim: U1.16 U4.8 | length 37.8
  Top Layer w0.3: U4.8 59.272,56.986 59.865,56.986 60.77,57.891 60.77,59.176 63.067,61.474 77.882,61.474 78.638,62.23 v1(80.772,62.23) ; v1(89.789,62.865) 89.799,62.875 89.799,66.631 U1.16
  Bottom Layer w0.3: v1(80.772,62.23) 84.148,62.23 84.402,61.976 88.9,61.976 v1(89.789,62.865)
IRQ: M1.14 U1.36 | length 23.7
  Top Layer w0.3: U1.36 95.849,73.616 97.028,74.795 v1@97.028,75.184 ; M1.14 97.441,90.424 v1(98.974,90.424) ; v1(99.314,84.328) 101.151,86.165 v1(101.151,90.68)
  Bottom Layer w0.3: v1(97.069,75.184) 97.069,82.083 v1(99.314,84.328) ; v1(98.974,90.424) 100.813,90.424 101.07,90.68 v1(101.151,90.68)
JTAG_TEST/SBW_TCK: H1.7 J1.6 J4.6 U1.4 | length 31.7
  Top Layer w0.3: U1.4 91.72,72.116 92.121,72.517 v1(92.202,72.517) ; v1(97.155,73.279) 99.163,73.279 99.651,72.791 J4.6 100.845,72.925 101.167,72.925 101.237,72.995 J1.6 109.063,72.995 110.363,74.295 v1(111.887,74.295)
  Bottom Layer w0.3: v1(92.202,72.517) 92.283,72.517 92.677,72.124 96,72.124 v1(97.155,73.279) ; v1(111.887,74.295) 114.774,74.295 115.554,73.516 115.554,73.145 115.951,72.747 H1.7
LEDB: R11.2 U1.44 | length 15.3
  Top Layer w0.3: R11.2 80.061,84.367 80.431,83.997 82.114,83.997 83.799,82.312 84.708,82.312 90.309,76.71 U1.44
LEDG: R6.2 U1.45 | length 22.4
  Top Layer w0.3: R6.2 76.2,84.709 77.11,85.619 78.826,85.619 79.239,85.207 79.239,83.722 79.702,83.259 81.492,83.259 82.891,81.859 84.52,81.859 89.809,76.571 U1.45
LEDR: R5.2 U1.46 | length 11
  Top Layer w0.3: R5.2 84.333,81.407 89.299,76.441 89.299,75.101 U1.46
"LoRa C\S\": J8.3 M1.5 R2.1 U1.15 | length 56.8
  Top Layer w0.3: v1(88.771,70.101) 89.309,69.563 U1.15 ; U1.15@89.299,66.066 89.254,66.021 89.254,63.545 89.187,63.478 89.187,62.126 89.428,61.884 J8.3 ; v1(101.753,89.408) 103.632,89.408 v1(108.585,94.361) ; v1(111.295,93.932) 112.28,93.932 112.804,94.456 M1.5 114.641,94.324 116.059,94.324 118.16,96.425 118.16,98.563 118.68,98.563 R2.1
  Bottom Layer w0.3: v1(88.771,70.101) 88.771,76.213 95.516,82.958 95.516,83.283 101.061,88.828 101.173,88.828 v1(101.753,89.408) ; v1(108.585,94.361) 110.784,94.361 111.165,93.98 v1@111.252,93.98
"Manual Buzzer Control": Q1.1 U1.9 | length 16.8
  Top Layer w0.3: Q1.1 71.391,71.407 79.129,71.407 v1(79.162,71.374) ; v1(85.471,69.088) 85.496,69.088 86.014,69.606 86.824,69.606 U1.9
  Bottom Layer w0.3: v1@79.121,71.374 v1(79.162,71.374) 81.575,68.961 83.419,68.961 83.546,69.088 v1(85.471,69.088)
MISO: J6.1 M1.2 U1.48 U6.5 | length 60.7
  Top Layer w0.3: U1.48 88.319,75.081 88.319,74.37 88.626,74.064 90.992,74.064 ; v1(91.059,73.279) 91.027,73.311 91.027,74.029 90.992,74.064 ; U6.5 93.988,59.079 v1(94.863,59.954) ; v1(98.044,77.216) 94.892,74.064 91.312,74.064 91.126,74.064 91.122,74.067 90.996,74.067 90.992,74.064 ; v1(100.528,81.55) 100.528,81.632 100.685,81.789 100.685,82.134 107.008,88.456 114.852,88.456 115.302,88.906 115.302,89.249 118.014,91.961 118.014,92.126 J6.1
  Bottom Layer w0.3: v1(91.059,73.279) 91.059,71.786 95.858,66.987 95.858,60.949 v1(94.863,59.954) ; v1(98.044,77.216) 98.024,77.236 98.024,80.498 99.06,81.534 100.512,81.534 v1(100.528,81.55)
MOSI: J6.2 M1.3 U1.1 U6.4 | length 62.7
  Top Layer w0.3: U1.1 88.434,73.616 88.438,73.611 89.208,73.611 89.358,73.461 v1(90.183,73.461) ; U6.4 94.488,58.131 94.75,58.393 94.75,58.574 95.367,59.191 v1(95.367,59.229) ; v1(94.488,78.613) 95.246,79.371 95.246,79.662 97.118,81.534 99.389,81.534 99.825,81.971 99.882,81.971 106.867,88.956 112.705,88.956 113.709,89.96 113.709,90.006 114.159,90.456 M1.3 114.959,90.906 115.366,90.906 118.186,93.726 J6.2
  Bottom Layer w0.3: v1(94.488,78.613) 94.431,78.67 94.431,78.887 93.849,79.469 93.349,79.469 90.183,76.303 v1(90.183,73.461) 90.183,70.958 95.217,65.924 95.217,65.155 94.865,64.803 94.862,64.803 94.26,64.201 94.26,59.705 94.678,59.287 95.31,59.287 v1(95.367,59.229)
NetC5_2: C5.2 Q2.3 U2.1 | length 10.1
  Top Layer w0.3: Q2.3 109.056,60.579 111.658,57.977 C5.2 112.028,56.047 112.028,55.739 113.671,54.096 113.671,53.029 U2.1
NetC8_2: C8.2 J2.A4_B9 J2.B4_A9 U3.6 | length 26.7
  Top Layer w0.3: C8.2 63.352,46.071 U3.6 65.024,45.756 65.382,45.398 65.382,45.383 65.601,45.164 77.168,45.164 79.239,47.235 81.172,47.235 81.401,47.006 81.401,46.506 J2.A4_B9 81.696,46.21 81.696,45.71 81.926,45.481 85.972,45.481 86.201,45.71 86.201,46.21 J2.B4_A9
NetC18_2: C18.2 U6.1 | length 2.2
  Top Layer w0.3: U6.1 96.982,56.139 C18.2
NetC19_2: C19.2 U6.10 | length 2.4
  Top Layer w0.3: C19.2 93.941,53.975 94.311,54.345 94.311,54.497 95.09,55.275 95.09,55.524 U6.10
NetD1_A: D1.A R8.1 | length 2
  Top Layer w0.3: D1.A 103.62,55.46 R8.1
NetD2_1: D2.1 R6.1 | length 2.5
  Top Layer w0.3: R6.1 77.713,80.543 77.889,80.719 77.889,81.129 D2.1
NetD2_2: D2.2 R11.1 | length 2.1
  Top Layer w0.3: D2.2 78.105,84.506 R11.1
NetD2_4: D2.4 R5.1 | length 3
  Top Layer w0.3: D2.4 79.955,81.095 79.955,80.554 80.612,79.897 81.291,79.897 R5.1
NetD5_A: D5.A R17.2 | length 2.6
  Top Layer w0.3: D5.A 70.092,41.756 70.612,41.236 R17.2
NetD5_C: D5.C U3.3 | length 1.7
  Top Layer w0.3: U3.3 67.051,43.434 D5.C
NetJ2_A5: J2.A5 R14.2 | length 3
  Top Layer w0.3: J2.A5 82.199,48.532 82.601,48.934 R14.2
NetJ2_B5: J2.B5 R13.2 | length 2.6
  Top Layer w0.3: R13.2 85.09,47.6 85.199,47.491 J2.B5
NetL1_2: L1.2 U4.6 | length 6.5
  Top Layer w0.3: L1.2 55.201,61.697 55.976,60.922 55.976,60.342 58.122,58.196 U4.6
NetLS1_N: LS1.N Q1.3 | length 4.9
  Top Layer w0.3: LS1.N 64.755,72.39 Q1.3
NetP1_1: P1.1 S3.2 | length 5
  Top Layer w0.3: P1.1 50.673,49.149 S3.2
NetQ2_1: Q2.1 R9.2 R10.2 | length 4.6
  Top Layer w0.3: R10.2 R9.2 104.252,61.529 Q2.1
NetR8_2: R8.2 U2.5 | length 4
  Top Layer w0.3: R8.2 106.426,55.372 107.693,54.105 107.693,53.007 U2.5
NetR15_1: R15.1 R16.2 U5.4 | length 6.9
  Top Layer w0.3: U5.4 74.082,50.231 74.27,50.419 R16.2 76.161,50.419 77.648,51.906 R15.1
NetR18_2: R18.2 U3.4 | length 2.6
  Top Layer w0.3: R18.2 66.924,48.57 U3.4
NetR19_2: R19.2 U3.1 | length 2.6
  Top Layer w0.3: R19.2 65.024,41.072 U3.1
NetR20_1: R20.1 R21.2 U4.2 | length 5
  Top Layer w0.3: U4.2 63.778,57.546 64.301,57.023 R20.1 R21.2
NetR22_1: R22.1 S1.1 S1.2 | length 10
  Top Layer w0.3: S1.1 S1.2 64.971,79.756 R22.1
NetR23_1: R23.1 S2.1 S2.2 | length 12.6
  Top Layer w0.3: R23.1 68.834,89.535 70.957,91.658 S2.1 S2.2
NetR27_1: R27.1 S4.3 S4.4 | length 10.6
  Top Layer w0.3: S4.3 86.106,51.433 86.106,57.15 86.07,57.186 S4.4 86.106,59.383 R27.1
NetR27_2: R27.2 U1.14 | length 4.6
  Top Layer w0.3: R27.2 87.224,63.856 88.799,65.431 88.799,66.631 U1.14
R\e\s\e\t\: J8.1 M1.6 R1.1 U1.19 | length 53.4
  Top Layer w0.3: v1(89.789,70.485) 91.309,68.965 91.309,65.499 91.534,65.274 91.534,63.02 91.928,62.626 J8.1 ; v1(111.542,94.935) 113.064,96.456 M1.6 114.859,96.456 116.128,97.725 116.128,98.385 116.498,98.755 R1.1
  Bottom Layer w0.3: v1(89.789,70.485) 89.789,70.566 89.581,70.774 89.581,76.383 108.193,94.996 v1@111.506,94.996
Reset: U1.8
Reset/SBW_TDIO: C1.2 H1.8 J1.8 J4.8 R12.1 U1.5 | length 36.1
  Top Layer w0.3: U1.5 92.217,71.616 93.296,72.695 v1(93.296,72.771) ; J4.8 105.049,75.291 C1.2 105.467,75.495 J1.8 ; R12.1 107.717,80.285 J1.8 ; H1.8 112.722,75.495 J1.8
  Bottom Layer w0.3: v1(93.296,72.771) 95.631,72.771 98.101,75.241 100.661,75.241 J4.8
RTS: J7.2@100.076,79.756 U1.37 | length 8.6
  Top Layer w0.3: U1.37 93.809,75.516 93.819,75.526 95.502,75.526 98.66,78.684 99.182,78.684 100.076,79.578 J7.2@100.076,79.756
SCK: M1.4 U1.2 U6.2 | length 59.4
  Top Layer w0.3: U1.2 89.063,73.116 89.502,72.677 91.473,72.677 92.257,73.461 v1(93.731,73.461) 93.788,73.404 93.788,73.131 93.898,73.021 93.898,67.762 94.615,67.046 v1(94.615,65.405) ; v1(94.996,80.264) 97.155,82.423 99.695,82.423 106.68,89.408 111.461,89.408 M1.4 ; U6.2 95.373,56.638 v1(96.393,57.658)
  Bottom Layer w0.3: v1(93.731,73.461) 93.731,75.704 95.09,77.064 95.09,79.226 94.996,79.32 v1(94.996,80.264) ; v1(94.615,65.405) 93.782,64.572 93.782,59.122 95.493,57.41 95.764,57.41 95.954,57.601 96.336,57.601 v1(96.393,57.658)
SCL: H2.4 J5.1 R4.1 U1.12 | length 16.7
  Top Layer w0.3: J5.1 70.886,67.945 H2.4 77.673,67.945 77.758,67.86 80.584,67.86 80.838,67.606 85.819,67.606 86.259,68.046 86.259,68.106 86.269,68.116 U1.12
SDA: H2.3 J5.2 R3.1 U1.13 | length 23.8
  Top Layer w0.3: J5.2 74.295,66.421 H2.3 78.195,65.405 79.668,66.878 R3.1 80.098,66.878 80.468,66.508 80.468,64.077 81.563,62.983 83.283,62.983 85.112,64.812 87.291,64.812 88.309,65.83 U1.13
UCA0_CLK/JTAG_TMS: H1.6 J1.4 J4.4 U1.33 | length 21.2
  Top Layer w0.3: U1.33 97.278,72.116 99.103,70.291 J4.4 107.513,70.291 J1.4 112.405,70.495 113.976,72.066 H1.6
UCA0_RX/MISO/JTAG_TDI: H1.5 J1.2 J4.2 J7.3@101.326,79.756 U1.32 | length 40.8
  Top Layer w0.3: U1.32 96.918,71.616 100.711,67.823 J4.2 100.811,67.891 107.613,67.891 107.692,67.97 111.781,67.97 111.933,67.818 v1(112.014,67.818) ; v1@100.33,76.835 101.326,77.831 J7.3@101.326,79.756
  Bottom Layer w0.3: v1(100.371,76.835) 101.513,75.692 101.513,68.593 J4.2 ; v1(112.014,67.818) 112.649,67.818 113.665,66.802 115.316,66.802 116.554,68.04 116.554,70.864 H1.5
UCA0_STE/JTAG_TCK: H1.4 J1.5 J4.5 U1.34 | length 20.4
  Top Layer w0.3: U1.34 97.474,72.616 98.549,71.541 J4.5 111.385,71.541 111.552,71.374 v1(111.633,71.374)
  Bottom Layer w0.3: v1(111.633,71.374) 111.675,71.374 111.959,71.09 114.646,71.09 114.87,70.866 H1.4
UCA0_TX/MOSI/JTAG_TDO: H1.1 J1.1 J4.1 J7.4 U1.31 | length 36.5
  Top Layer w0.3: U1.31 96.136,71.116 J4.1 100.761,66.491 100.911,66.641 107.613,66.641 J1.1 113.23,66.745 H1.1 ; J7.4 102.576,75.986 v1@102.616,75.946
  Bottom Layer w0.3: J4.1 102.617,68.447 v1(102.617,75.986)
Vbat: C3.2 C4.1 C9.1 C12.2 L1.1 R17.1 R24.2 S3.1 U3.2 U4.1 U5.1 U5.3 | length 74.8
  Top Layer w0.3: C12.2 49.872,59.258 52.208,56.921 53.651,56.921 L1.1 ; U4.1 61.886,56.896 61.976,56.806 C9.1 56.306,55.042 55.201,56.146 L1.1 ; R17.1 68.732,41.236 67.62,42.348 66.856,42.348 66.114,43.091 66.114,43.579 65.974,43.719 65.974,43.876 65.616,44.234 65.616,44.249 65.397,44.468 63.279,44.468 C4.1 60.036,44.628 S3.1@58.015,46.649 ; U5.3 69.124,50.231 C3.2 ; R24.2 82.053,61.555 79.97,61.555 73.554,55.139 73.117,55.139 72.94,54.962 72.94,54.525 72.704,54.289 72.704,53.242 72.222,52.759 72.2,52.759 71.572,52.131 U5.1 70.952,52.131 70.599,51.778 70.575,51.778 69.673,50.876 69.673,50.637 69.303,50.267 C3.2 ; L1.1 54.426,52.83 57.715,49.541 S3.1 S3.1@58.015,46.649 ; S3.1@58.015,46.649 61.633,50.267 C3.2
Vbat/2: C17.2 R24.1 R25.2 U1.11 | length 11.2
  Top Layer w0.3: R24.1 82.285,63.805 81.915,64.175 C17.2 82.169,66.802 83.769,66.802 R25.2 84.15,66.827 86.756,66.827 87.861,67.933 87.861,68.299 87.555,68.606 86.844,68.606 U1.11
pads on no net: J2.A6 J2.A7 J2.A8 J2.B6 J2.B7 J2.B8 LS1.1 LS1.2 M1.9 S3.3 U1.10 U1.21 U1.22 U1.26 U1.27 U1.28 U1.29 U1.30 U1.35 U2. U2.6 U2.7 U2.11 U2.13 U2.14 U2.15 U2.16 U2.17 U2.18 U2.20 U6.7

## Polygon pours and split planes (outlines as drawn)
GND on Bottom Layer "GND_L02_P002" (solid, pour order 2): 36.195,33.02 36.576,33.401 36.576,112.395 137.668,112.395 137.668,38.735 131.826,32.893 131.699,33.02 84.836,33.02
GND on Top Layer "GND_L01_P003" (solid, pour order 3): 36.195,33.02 36.576,33.401 36.576,112.395 137.668,112.395 137.668,38.735 131.826,32.893 131.699,33.02 84.836,33.02

## Text inside footprints (layer, text, board x,y; h text height)
J2: Component Outlines "PCB EDGE" at 80.899,37.846 h1
LS1: Top Overlay "+" at 66.731,65.476 h0.81 r180; Top Overlay "-" at 66.731,71.826 h0.81 r180; Component Outlines "-" at 66.731,71.826 h0.81 r180; Component Outlines "+" at 66.731,65.476 h0.81 r180
M1: Top Overlay "*" at 116.359,86.856 h0.8 r180